# Altium PCB PCB_BAT.pcbdoc (part 2 of 2)
Units mil, origin at the board's own origin, x right, y up, seen from the top; angles counter-clockwise.
Board outline 4353.96 x 2705.18 mil, 2 copper layers (Top Layer, Bottom Layer), stack 62.206 mil thick; 127 components, 83 nets, 401 pads, 369 vias.
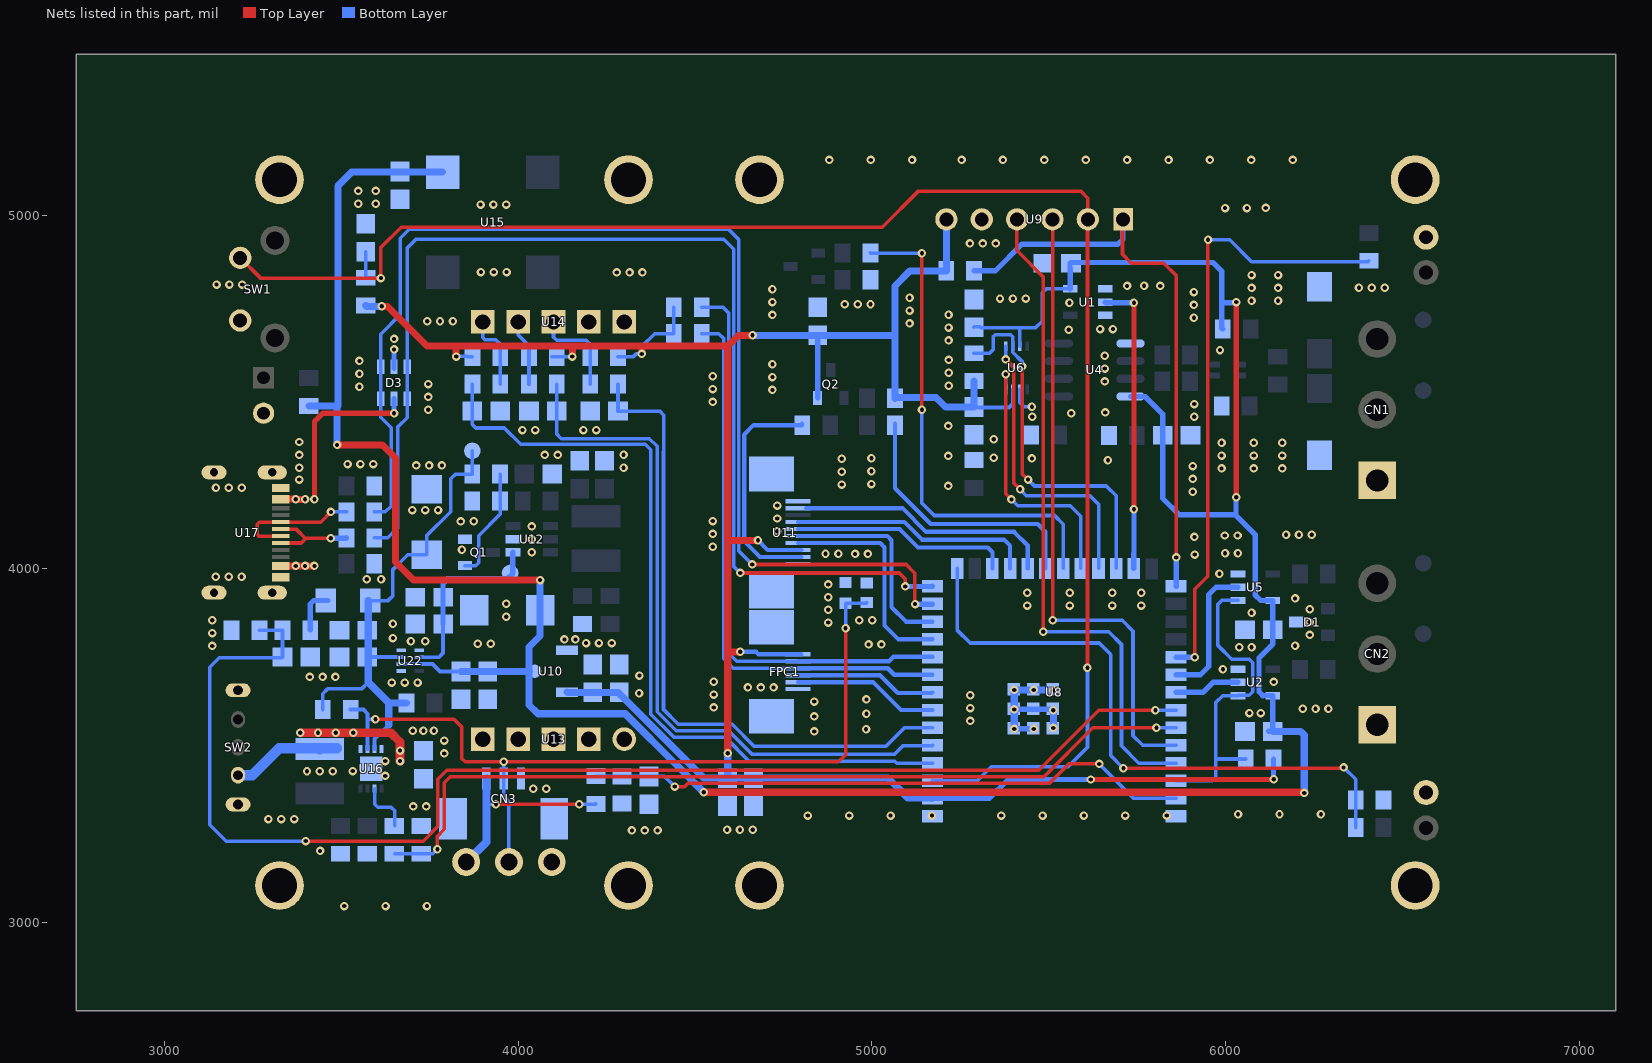
[diagram p2: the nets of this part, all layers, seen from the top]

## Via types
v1: diameter 24.02, hole 12, Top Layer to Bottom Layer, 369 vias

## Nets (pads, with @x,y where several pads share a name; then routed paths per layer and width w, separated by ;. In a path a pad name is that pad's centre, name@x,y a point inside that pad or via, vN(x,y) a via of type N, cw(c..) or ccw(c..) an arc to the next point about the centre after c; other vN are vias at no path point) (continued)
$2N79: C30.2 CN3.2 R48.2 R53.2 U16.6 U21.1 | length 2393.5
  Top Layer w10: v1(3596.18,3574.69) 3818.33,3574.69 3839.87,3553.15 3839.87,3464.04 3849.87,3454.04 v1(3958.87,3454.04) 4905.47,3454.04 4925.87,3474.44 v1(4925.87,3832.04)
  Bottom Layer w10: 3574.18,3574.69 v1(3596.18,3574.69) ; v1(3958.87,3454.04) CN3.2@3958.87,3407.13 3958.87,3356.04 3973.87,3341.04 U21.1@3973.87,3170.8 ; v1(4925.87,3832.04) R53.2@4925.87,3902.18 4983.58,3902.18 C30.2@4985.87,3904.48
  Bottom Layer w11: R48.2@3526.24,3602.04 3562.09,3602.04 3574.18,3589.95 3574.18,3574.69 U16.6@3574.18,3489.88
$2N87: Q1.1 R26.1 R27.2 | length 318.7
  Bottom Layer w10: Q1.1@3848.86,4008.29 3879.62,4008.29 3888.23,4016.91 3888.23,4093.69 3948.6,4154.06 R26.1@3948.6,4191.69 R27.2@3948.6,4267.69
$2N101: R39.1 U16.2 | length 150.9
  Bottom Layer w10: U16.2@3593.86,3378.26 3594.14,3377.99 3594.14,3334.27 3603.14,3325.27 3640.47,3325.27 3650.47,3315.27 R39.1@3650.47,3272.64
$2N102: U14.2
+3.3V: C5.2 C7.2 C8.2 C13.2 C14.2 C15.2 FPC1.1 Q2.2 R2.2 R5.2 R11.2 R17.2 R25.2 R33.2 R34.2 R36.2 R37.2 R38.2 U6.3 U8.2 U9.6 U10.3 U11.8 | length 7140.7
  Top Layer w15: v1(5618.87,3404.04) 6135.92,3404.04 v1(6136.77,3404.88)
  Top Layer w20: v1(3613.87,4742.04) 3630.38,4742.04 3742.38,4630.04 3824.5,4630.04 ; v1(3824.66,4600.04) 3824.5,4600.2 3824.5,4630.04 ; v1(4153.18,4600.04) 4153.18,4628.72 4154.49,4630.04 ; v1(4349.61,4607.38) 4349.61,4628.04 4347.61,4630.04 ; v1(4592.65,3478.2) 4592.65,3764.58 ; v1(4628.1,3765.02) 4627.66,3764.58 4592.65,3764.58 ; v1(4662.87,4660.04) 4622.5,4660.04 4592.65,4630.19 ; v1(4678.08,4080.6) 4677.32,4079.85 4592.65,4079.85 ; 3824.5,4630.04 4154.49,4630.04 ; 4154.49,4630.04 4347.61,4630.04 ; 4347.61,4630.04 4592.5,4630.04 4592.65,4630.19 ; 4592.65,3764.58 4592.65,4079.85 ; 4592.65,4079.85 4592.65,4630.19
  Bottom Layer w10: v1(3824.66,4600.04) 3824.93,4600.31 3856.23,4600.31 3856.5,4600.04 R36.2@3870.5,4600.04 ; R37.2@4095.24,4600.04 v1(4153.18,4600.04) ; R38.2@4282.24,4600.04 4325.87,4600.04 4333.22,4607.38 v1(4349.61,4607.38) 4349.61,4628.67 4385.91,4664.97 4439.87,4664.97 R33.2@4439.87,4739.63 ; C5.2@5288.87,4457.41 5290.24,4456.04 5387.87,4456.04 5398.96,4467.12 U6.3@5398.96,4507.16
  Bottom Layer w12: v1(4628.1,3765.02) 4672.89,3765.02 4679.88,3758.03 FPC1.1@4800.14,3758.03 ; v1(4678.08,4080.6) 4705.49,4053.2 U11.8@4800.14,4053.2
  Bottom Layer w15: Q2.2@4846.47,4482.97 4846.87,4483.37 4846.87,4660.04 C15.2@4846.87,4660.67 ; U8.2@5171.91,3350.04 5331.87,3350.04 5385.87,3404.04 v1(5618.87,3404.04) ; R5.2@6136.09,3461.85 6136.09,3405.55 v1(6136.77,3404.88)
  Bottom Layer w20: R11.2@3568.87,4744.36 3571.19,4742.04 v1(3613.87,4742.04) ; U10.3@4138.27,3650.98 4139.21,3650.04 4282.87,3650.04 4525.18,3407.73 C7.2@4591.77,3407.73 ; v1(4592.65,3478.2) 4592.65,3408.62 C7.2@4591.77,3407.73 ; v1(4662.87,4660.04) 4846.87,4660.04 5063.87,4660.04 5065.24,4658.67 ; U8.2@5171.55,3350.39 5169.46,3352.49 5101.42,3352.49 5045.87,3408.04 4666.05,3408.04 C8.2@4665.74,3407.73 C7.2@4591.77,3407.73 ; U9.6@5210.88,4988.04 5211.5,4987.41 5211.5,4843.57 R17.2@5210.5,4842.57 5108.4,4842.57 5065.24,4799.41 5065.24,4658.67 ; R2.2@5288.6,4530.83 5288.87,4530.55 C5.2@5288.87,4457.41 5208.5,4457.41 5181.9,4484.01 5067.22,4484.01 R25.2@5065.24,4482.04 5065.24,4658.67
+5V: C1.2 C2.2 C3.2 C4.1 C6.2 C11.2 C12.2 C22.2 R10.1 R12.2 TVS1.1 U1.5 U2.5 U4.8 U5.5 U6.7 U10.2 U15.1 U22.2 U22.7 | length 8374.4
  Top Layer w15: v1(6030.87,4202.04) v1(6030.87,4754.04)
  Top Layer w20: v1(3487.87,4350.04) 3616.07,4350.04 3652.87,4313.24 3652.87,4019.04 3703.93,3967.98 v1(4061.81,3967.98) ; v1(4524.87,3368.04) 6220.87,3368.04 v1(6222.87,3366.04)
  Bottom Layer w10: C4.1@5288.87,4682.67 5290.24,4684.04 5306.5,4684.04 5308.5,4682.04 5418.96,4682.04 ; U6.7@5418.96,4629.21 5418.96,4682.04 ; U1.5@5561.06,4792.04 5493.87,4792.04 5481.87,4780.04 5481.87,4700.04 5463.87,4682.04 5418.96,4682.04 ; U1.5@5561.13,4791.97 U1.5@5561.66,4791.44
  Bottom Layer w11: U22.2@3669.67,3730.2 U22.7@3720.07,3730.2 3757.71,3730.2 3778.5,3709.41 C11.2@3837.87,3709.41
  Bottom Layer w15: C1.2@5560.34,4864.04 5560.34,4851.3 5561.13,4850.51 U1.5@5561.13,4791.97 ; C1.2@5563.24,4864.04 5565.24,4866.04 5964.87,4866.04 5989.87,4841.04 5989.87,4752.04 ; U4.8@5731.51,4487.33 5773.04,4487.33 5822.5,4437.87 C6.2@5822.5,4377.51 5822.5,4199.41 5869.55,4152.37 6030,4152.37 ; R10.1@5992.5,4678.04 5990.5,4680.04 5989.87,4680.04 5989.87,4752.04 ; v1(6030.87,4202.04) 6030,4201.16 6030,4152.37 ; v1(6030.87,4754.04) 6028.87,4752.04 5989.87,4752.04 ; C3.2@6122.09,3540.16 6133.87,3540.16 U2.5@6133.89,3641.3 6105.61,3641.3 6094.87,3652.04 6094.87,3748.04 6134.09,3787.25 C2.2@6134.09,3827.28 6133.89,3827.48 U5.5@6133.89,3910.35 6133.57,3910.04 6099.87,3910.04 6083.87,3926.04 6083.87,4097.04 6030,4150.91 6030,4152.37
  Bottom Layer w20: R12.2@3407.87,4460.46 3489.87,4460.46 ; v1(3487.87,4350.04) 3487.87,4458.46 3489.87,4460.46 ; U15.1@3786.15,5121.77 3529.4,5121.57 3489.87,5082.04 3489.87,4460.46 ; C11.2@3837.87,3709.41 C12.2@3913.87,3709.41 U10.2@4030.84,3709.41 ; U10.2@4031.48,3710.04 U10.2@4030.87,3709.44 ; v1(4061.81,3967.98) TVS1.1@4061.81,3882.04 4061.81,3809.98 4030.87,3779.04 U10.2@4030.87,3709.44 ; v1(4524.87,3368.04) 4468.87,3424.05 4468.87,3424.66 4452.47,3441.05 4451.86,3441.05 4302.87,3590.04 4055.87,3590.04 4030.87,3615.04 U10.2@4030.87,3709.44 ; C3.2@6134.09,3540.16 6212.76,3540.16 6222.87,3530.04 v1@6222.87,3364.04
A: R37.1 R40.2 U14.4 | length 188.7
  Bottom Layer w10: U14.4@3999.87,4698.04 3999.87,4661.04 4030.5,4630.41 R37.1@4030.5,4600.04 R40.2@4030.5,4522.04
B: R36.1 R43.2 U14.5 | length 214.6
  Bottom Layer w10: U14.5@3899.87,4698.04 3899.87,4654.04 3905.87,4648.04 3936.87,4648.04 3949.24,4635.67 R36.1@3949.24,4600.04 R43.2@3949.24,4522.04
BAT_ADC: C10.2 R18.1 R21.2 U8.39 | length 1720.1
  Top Layer w10: v1(4442.87,3384.09) 4470.92,3384.09 4480.87,3394.04 5502.87,3394.04 5556.88,3448.05 v1(5643.39,3448.05)
  Bottom Layer w10: R18.1@4219.59,3413.69 4413.22,3413.69 v1@4442.83,3384.09 ; v1(5643.39,3448.05) 5741.04,3350.39 U8.39@5860.53,3350.39
BEEP: R41.1 U8.21 | length 1402.8
  Top Layer w10: v1(5141.84,4449.44) v1(5141.84,4892.01)
  Bottom Layer w10: R41.1@4996.15,4893.35 4997.49,4892.01 v1(5141.84,4892.01) ; v1(5141.84,4449.44) 5141.84,4185.07 5176.36,4150.55 5516.79,4150.55 5541.68,4125.67 5541.68,4001.42 U8.21@5541.04,4000.78
CHARGING: R35.1 R39.2 U8.35 | length 2457.3
  Top Layer w10: v1(3771.65,3207.03) 3771.65,3243.82 3790.87,3263.04 3790.87,3395.04 3807.87,3412.04 5486.87,3412.04 5624.87,3550.04 v1(5804.69,3550.04)
  Bottom Layer w10: R39.2@3650.47,3193.9 R35.1@3725.87,3193.9 3758.53,3193.9 v1(3771.65,3207.03) ; v1(5804.69,3550.04) 5860.89,3550.04 U8.35@5860.53,3550.39
CTP_INT: FPC1.4 U8.8 | length 402
  Bottom Layer w12: FPC1.4@4791.14,3698.97 5022.94,3698.97 5073.33,3648.58 5169.74,3648.58 U8.8@5171.55,3650.39
CTP_RST: FPC1.5 U8.7 | length 413.1
  Bottom Layer w12: FPC1.5@4791.14,3679.29 5003.62,3679.29 5082.52,3600.39 U8.7@5171.55,3600.39
CTP_SCL: FPC1.3 R34.1 U8.9 | length 1582.5
  Bottom Layer w10: R34.1@4518.84,4664.97 4567.13,4664.97 4580.87,4651.23 4580.87,3746.04 4608.25,3718.66 FPC1.3@4791.14,3718.66
  Bottom Layer w12: FPC1.3@4791.14,3718.66 5045.25,3718.66 5063.52,3700.39 U8.9@5171.55,3700.39
CTP_SDA: FPC1.2 R33.1 U8.10 | length 1637
  Bottom Layer w10: R33.1@4518.84,4739.63 4579.16,4739.63 4594.87,4723.92 4594.87,3761.04 4617.57,3738.34 FPC1.2@4791.14,3738.34
  Bottom Layer w12: FPC1.2@4791.14,3738.34 5048.87,3738.34 5061.51,3750.98 5170.96,3750.98 U8.10@5171.55,3750.39
DMX_EN: U1.2 U8.25 | length 833.2
  Top Layer w15: v1(5741.2,4168.03) v1(5741.19,4752.03)
  Bottom Layer w15: U1.2@5660.09,4754.04 5662.09,4752.03 v1(5741.19,4752.03) ; U8.25@5741.04,4000.78 5741.04,4042.62 5741.2,4042.77 v1(5741.2,4168.03)
DMX_OE: R2.1 U6.6 U8.24 | length 1051.2
  Top Layer w10: v1(5424.87,4572.04) 5424.87,4269.04 v1(5441.87,4252.04)
  Bottom Layer w10: R2.1@5288.6,4609.57 5332.87,4609.57 5342.87,4619.57 5342.87,4656.04 5348.87,4662.04 5392.87,4662.04 5398.96,4655.95 U6.6@5398.96,4629.21 5398.96,4611.95 5424.87,4586.04 v1(5424.87,4572.04) ; v1(5441.87,4252.04) 5459.87,4234.04 5663.11,4234.04 5691.04,4206.1 U8.24@5691.04,4000.78
DMX_RX: U6.4 U8.22 | length 767.1
  Top Layer w10: v1(5378.87,4550.04) 5378.87,4212.04 v1(5394.87,4196.04)
  Bottom Layer w10: v1(5378.87,4550.04) 5378.96,4549.95 U6.4@5378.96,4507.16 ; v1(5394.87,4196.04) 5412.25,4178.66 5560.85,4178.66 5591.04,4148.47 U8.22@5591.04,4000.78
DMX_TX: U6.5 U8.23 | length 842.4
  Top Layer w10: v1(5378.87,4592.04) 5401.87,4569.04 5401.87,4242.04 v1(5419.27,4224.64)
  Bottom Layer w10: v1(5378.87,4592.04) 5378.96,4592.12 U6.5@5378.96,4629.21 ; v1(5419.27,4224.64) 5437.14,4206.77 5616.99,4206.77 5641.09,4182.68 U8.23@5641.09,4000.83
DN: R50.1 U17.A7 U17.B7 | length 351.6
  Top Layer w10: U17.A7@3315.15,4092.55 3314.64,4092.04 3266.87,4092.04 3261.87,4097.04 3261.87,4126.04 3267.75,4131.92 U17.B7@3328.76,4131.87 3441.75,4131.92 v1(3470.37,4160.54)
  Bottom Layer w10: v1(3470.37,4160.54) 3470.54,4160.7 R50.1@3514.5,4160.7
DP: R51.2 U17.A6 U17.B6 | length 300.9
  Top Layer w10: U17.B6@3315.15,4072.86 3386.69,4072.86 3399.87,4086.04 ; U17.A6@3315.15,4112.23 3371.68,4112.23 3397.87,4086.04 3399.87,4086.04 ; v1(3469.87,4086.04) 3399.87,4086.04
  Bottom Layer w15: v1(3469.87,4086.04) 3513.17,4086.04 R51.2@3514.5,4087.37
EN: C9.2 R11.1 SW1.1 U8.3 U9.2 | length 4740.9
  Top Layer w10: SW1.1@3213.89,4879.23 3271.08,4822.04 v1(3611.87,4822.04) 3611.87,4909.04 3668.87,4966.04 5029.87,4966.04 5131.87,5068.04 5590.87,5068.04 5610.87,5048.04 U9.2@5610.88,4988.04 ; v1(5609.87,3719.91) U9.2@5609.87,4977.04 ; U9.2@5609.87,4977.04 5610.87,4978.04 U9.2@5610.88,4988.04 ; U9.2@5609.87,4977.04 5609.87,4987.03 U9.2@5610.88,4988.04
  Bottom Layer w10: C9.2@3568.87,4896.36 R11.1@3568.87,4823.1 3610.81,4823.1 v1(3611.87,4822.04) ; U8.3@5171.55,3400.39 5297.98,3400.39 5337.62,3440.04 5554.87,3440.04 5609.87,3495.04 v1(5609.87,3719.91)
ENCODER_A: C26.2 R40.1 U8.5 | length 2027.7
  Bottom Layer w10: R40.1@4109.24,4522.04 C26.2@4109.24,4446.04 4109.24,4380.86 4122.06,4368.04 4370.87,4368.04 4392.87,4346.04 4392.87,3596.04 4446.87,3542.04 4594.87,3542.04 4660.87,3476.04 5064.88,3476.04 5088.88,3500.04 5171.2,3500.04 U8.5@5171.55,3500.39
ENCODER_B: C25.2 R43.1 U8.4 | length 2250.5
  Bottom Layer w10: R43.1@3870.5,4522.04 3869.87,4521.41 3869.87,4408.04 3879.87,4398.04 3960.87,4398.04 4006.87,4352.04 4358.87,4352.04 4374.87,4336.04 4374.87,3589.05 4439.87,3524.04 4584.87,3524.04 4652.87,3456.04 5064.87,3456.04 5070.87,3450.04 5171.2,3450.04 U8.4@5171.55,3450.39
ENCODER_KEY: C27.2 R42.2 U8.6 | length 1868.4
  Bottom Layer w10: R42.2@4282.24,4522.04 C27.2@4282.24,4446.04 4399.87,4446.04 4411.87,4434.04 4411.87,4331.45 4410.87,4330.45 4410.87,3602.04 4452.87,3560.04 4604.87,3560.04 4666.86,3498.05 5039.89,3498.05 5092.23,3550.39 U8.6@5171.55,3550.39
GND: C1.1 C2.1 C3.1 C4.2 C5.1 C6.1 C7.1 C8.1 C9.1 C10.1 C11.1 C12.1 C13.1 C14.1 C15.1 C16.1 C17.2 C18.2 C20.2 C21.2 C22.1 C23.2 C24.1 C25.1 C26.1 C27.1 C28.2 C29.1 C30.1 CN1.1 CN2.1 CN3.1 CN3.4 CN3.5 D1.3 D3.2 D4.2 FPC1.6 FPC1.7 FPC1.8 LED1.2 LED2.2 LED3.2 pad.1 Q1.2 R3.2 R4.2 R13.2 R19.1 R20.1 R21.1 R24.1 R26.2 R32.1 R35.2 R44.1 R45.2 R47.2 R49.1 R52.2 R53.1 SW1.2 SW2.4 SW2.5 TVS1.2 U1.1 U1.3 U2.3 U3.1 U4.5 U5.3 U6.2 U7.1 U8.1 U8.40 U8.41 U9.5 U10.1 U11.1 U11.10 U11.11 U11.12 U12.2 U13.1 U13.2 U13.3 U13.4 U13.5 U14.1 U16.8 U16.9 U17.1 U17.2 U17.3 U17.4 U17.A1B12 U17.B1A12 U19.1 U22.1 U22.4 U22.5 | length 565.7
  Bottom Layer w10: U6.2@5418.96,4507.16 5418.96,4469.95 5430.87,4458.04 v1(5452.87,4458.04)
  Bottom Layer w15: D3.2@3648.87,4567.28 v1(3648.87,4620.04) ; v1(5402.85,3547.21) v1(5457.97,3547.21) ; v1(5402.85,3602.33) 5510.9,3602.33 v1(5513.2,3600.03)
  Bottom Layer w20: v1(5402.85,3547.21) v1(5402.85,3602.33) v1(5402.85,3657.45) v1(5457.97,3657.45) U8.41@5513.09,3657.45 ; v1(5513.2,3550.03) v1(5513.2,3600.03)
  other v1: 3507.87,3046.04 3624.89,3046.04 3741.92,3046.04 3439.87,3202.04 4321.48,3260.04 4357.87,3260.04 4394.27,3260.04 4590.48,3262.04 4626.87,3262.04 4663.27,3262.04 3293.86,3292.09 3330.26,3292.09 3366.66,3292.09 4818.85,3302.04 4935.87,3302.04 5052.89,3302.04 5169.92,3302.04 5365.67,3302.05 5482.69,3302.05 5599.71,3302.05 5716.73,3302.05 5833.75,3302.05 6035.83,3306.04 6152.85,3306.04 6269.87,3306.04 3703.48,3328.04 3739.87,3328.04 4042.67,3378.04 4079.07,3378.04 3623.87,3414.04 3402.75,3427.27 3439.15,3427.27 3475.55,3427.27 3531.87,3428.04 3623.87,3456.04 3790.87,3477.84 3790.87,3514.24 4837.15,3540.04 3701.87,3542.04 3731.87,3542.04 3761.87,3542.04 4983.87,3546.04 5278.1,3569.66 4837.15,3582.23 4984.87,3590.04 6067.87,3592.04 6099.87,3592.04 6218.48,3604.04 6254.87,3604.04 6291.27,3604.04 5278.1,3606.05 4552.99,3607.73 4837.15,3624.43 4984.87,3630.43 5278.1,3642.45 4552.99,3644.13 4341.87,3648.04 5513.2,3656.03 4649.52,3664.34 4685.91,3664.34 4722.31,3664.34 3642.48,3678.04 3678.87,3678.04 3715.27,3678.04 6136.87,3680.04 4552.99,3680.53 3410.48,3694.04 3446.87,3694.04 3483.27,3694.04 4342.87,3698.04 5992.87,3716.04 6038.87,3778.04 6073.87,3778.04 3134.87,3781.64 6196.87,3782.04 4990.67,3786.04 5027.07,3786.04 3885.67,3788.04 3922.07,3788.04 4191.83,3789.69 4228.23,3789.69 4264.63,3789.69 3696.65,3795.14 3737.09,3795.14 4130.87,3800.04 4161.87,3800.04 3645.87,3804.04 6238.21,3812.97 3134.87,3818.04 3645.87,3844.48 4876.87,3847.84 6238.21,3849.37 3134.87,3854.43 4964.67,3854.04 5001.07,3854.04 3966.03,3864.5 6073.7,3875.47 4876.87,3884.24 6238.21,3885.77 5439.87,3896.04 5559.87,3896.04 5679.87,3896.04 5761.87,3896.05 3966.03,3900.89 6196.87,3916.04 4876.71,3919.42 5439.87,3932.43 5559.87,3932.43 5679.87,3932.43 5761.87,3932.44 4876.71,3955.82 3571.65,3970.02 3612.09,3970.02 3144.87,3977.65 3181.26,3977.65 3217.66,3977.65 5982.87,3986.04 5913.48,4040.04 4869.01,4042.2 4905.41,4042.2 4952.67,4042.04 4989.07,4042.04 5998.87,4044.04 6035.27,4044.04 4038.23,4046.81 3840.87,4054.04 4549.99,4062.22 4038.23,4083.2 5912.48,4090.04 5997.87,4094.04 6034.27,4094.04 6171.48,4096.04 6207.87,4096.04 6244.27,4096.04 4549.99,4098.62 4732.35,4105.72 4038.23,4119.6 3837.68,4133.78 3874.32,4134.25 4549.99,4135.01 4732.35,4142.12 3700.48,4166.04 3736.87,4166.04 3773.27,4166.04 4732.35,4178.51 5907.87,4217.64 3145.28,4228.76 3181.67,4228.76 3218.07,4228.76 5215.87,4234.04 4914.92,4238.14 4998.87,4239.64 3380.87,4252.04 5907.87,4254.04 4914.92,4274.54 4998.87,4276.04 5988.87,4283.64 6079.87,4283.64 6160.87,4283.64 3380.87,4285.64 4297.87,4285.84 5907.87,4290.43 3711.48,4292.04 3747.87,4292.04 3784.27,4292.04 3517.48,4296.04 3553.87,4296.04 3590.27,4296.04 5667.66,4307.16 4914.92,4310.94 4998.87,4312.43 5452.87,4312.04 5344.87,4314.04 5215.87,4319.04 5988.87,4320.04 6079.87,4320.04 6160.87,4320.04 3380.87,4322.04 4075.23,4321.69 4111.63,4321.69 4297.87,4322.24 5988.87,4356.43 6079.87,4356.43 6160.87,4356.43 3380.87,4358.43 5344.87,4366.04 4011.87,4392.04 4048.27,4392.04 4184.48,4392.04 4220.87,4392.04 5215.87,4404.04 5453.87,4430.04 5911.75,4429.64 5563.87,4440.04 5659.87,4442.04 3745.87,4449.64 5911.75,4465.79 4549.97,4471.63 3745.87,4486.04 4718.87,4505.64 4549.97,4508.02 3551.18,4514.85 5217.87,4517.64 3745.87,4522.43 5658.87,4529.64 4718.87,4542.04 4549.97,4544.42 3551.18,4551.24 5217.87,4554.04 5658.87,4566.04 4718.87,4578.43 3551.18,4587.64 5217.87,4590.43 5658.87,4602.43 5984.59,4618.38 5216.87,4645.64 3648.87,4650.04 5556.87,4676.04 5645.52,4677.97 5681.91,4677.97 5216.87,4682.04 5106.87,4693.64 3742.48,4700.04 3778.87,4700.04 3815.27,4700.04 5910.84,4709.55 4718.87,4717.64 5216.87,4718.43 5106.87,4730.04 5910.84,4745.94 4923.48,4748.04 4959.87,4748.04 4996.27,4748.04 5558.87,4752.04 4718.87,4754.04 6073.87,4757.64 6148.87,4757.64 5362.48,4764.04 5398.87,4764.04 5435.27,4764.04 5106.87,4766.43 5910.84,4782.34 4718.87,4790.43 6073.87,4794.04 6148.87,4794.04 6377.52,4794.72 6413.92,4794.72 6450.31,4794.72 5721.87,4799.64 5769.87,4800.04 5815.87,4799.64 3147.02,4803.78 3183.42,4803.78 3219.81,4803.78 6073.87,4830.43 6148.87,4830.43 4278.48,4838.04 4314.87,4838.04 4351.27,4838.04 3894.48,4838.97 3930.87,4838.97 3967.27,4838.97 5277.48,4920.04 5313.87,4920.04 5350.27,4920.04 5998.87,5020.04 6060.87,5020.04 6113.87,5020.43 3893.48,5030.04 3929.87,5030.04 3966.27,5030.04 3547.87,5032.04 3596.87,5032.04 3547.87,5068.43 3596.87,5068.43 4879.85,5156.04 4996.87,5156.04 5113.89,5156.04 5253.87,5156.04 5370.89,5156.04 5487.92,5156.04 5604.94,5156.04 5721.96,5156.04 5838.98,5156.04 5956,5156.04 6073.02,5156.04 6190.05,5156.04
IO0: R17.1 U8.27 U9.1 | length 1657.7
  Top Layer w10: U9.1@5710.88,4988.04 5708.87,4986.03 5708.87,4889.04 5733.87,4864.04 5825.87,4864.04 5860.57,4829.34 v1(5860.57,4032.09)
  Bottom Layer w15: R17.1@5289.24,4842.57 5349.4,4842.57 5424.87,4918.04 5695.87,4918.04 5709.53,4931.69 U9.1@5709.53,4977.04 ; U8.27@5860.53,3950.39 v1@5860.53,4032.05
KEY: R38.1 R42.1 U14.3 | length 267.5
  Bottom Layer w10: U14.3@4099.87,4698.04 4099.87,4655.04 4108.87,4646.04 4191.87,4646.04 4203.23,4634.68 4203.23,4522.31 R42.1@4203.5,4522.04
LCD_A: R30.1 U11.9 | length 659.5
  Bottom Layer w12: U11.9@4800.14,4033.51 4683.41,4033.51 4638.9,4078.01 4638.9,4379.07 4665.87,4406.04 4802.5,4406.04 R30.1@4802.5,4410.04
LCD_BL: R28.1 U8.20 | length 763.4
  Bottom Layer w12: R28.1@5065.24,4410.04 5065.24,4227.67 5166.46,4126.46 5469.39,4126.46 5491.48,4104.37 5491.48,4001.22 U8.20@5491.04,4000.78
LCD_CS: U8.17 U11.5 | length 623.1
  Bottom Layer w12: U11.5@4791.14,4112.25 5078.67,4112.25 5130.72,4060.2 5327.72,4060.2 5341.04,4046.87 U8.17@5341.04,4000.78
LCD_RS: U8.11 U11.7 | length 622.7
  Bottom Layer w12: U11.7@4791.14,4072.88 4791.43,4072.59 5023.87,4072.59 5035.87,4060.59 5035.87,3839.66 5075.14,3800.39 U8.11@5171.55,3800.39
LCD_RST: U8.12 U11.6 | length 591.6
  Bottom Layer w12: U11.6@4791.14,4092.57 5043.87,4092.57 5055.87,4080.57 5055.87,3891.31 5096.79,3850.39 U8.12@5171.55,3850.39
LCD_SCL: U8.18 U11.4 | length 692
  Bottom Layer w12: U11.4@4791.14,4131.94 5091.98,4131.94 5141.63,4082.28 5374.08,4082.28 5391.04,4065.32 U8.18@5391.04,4000.78
LCD_SDA: U8.19 U11.2 | length 735.7
  Bottom Layer w12: U11.2@4814.14,4171.31 5086.61,4171.31 5153.54,4104.37 5402.56,4104.37 5441.04,4065.88 U8.19@5441.04,4000.78
LED2: R22.2 R49.2 U8.15 | length 1781.7
  Top Layer w10: v1(5711.49,3436.03) 6331.87,3436.03 v1(6333.87,3438.04)
  Bottom Layer w10: U8.15@5241.04,4000.78 5241.04,3959.66 5241.14,3959.56 5241.14,3940.51 5241.04,3940.42 5241.04,3826.87 5277.87,3790.04 5642.87,3790.04 5675.53,3757.38 5675.53,3471.98 v1(5711.49,3436.03) ; v1(6333.87,3438.04) 6334.87,3438.04 6368.5,3404.41 R49.2@6368.5,3346.04 R22.2@6368.5,3268.04
LED3: R23.2 U8.31 | length 1730
  Top Layer w10: v1(5912.87,3750.04) 5912.87,3942.04 5949.87,3979.04 5949.87,4929.04 v1(5950.87,4930.04)
  Bottom Layer w10: v1(5950.87,4930.04) 6011.87,4930.04 6073.87,4868.04 6403.24,4868.04 R23.2@6405.87,4870.67
  Bottom Layer w15: U8.31@5860.53,3750.39 5860.89,3750.04 v1(5912.87,3750.04)
RXD0: U8.36 U9.3 | length 1802.8
  Top Layer w10: U9.3@5510.88,4988.04 5511.87,4987.04 v1(5511.87,3854.04)
  Bottom Layer w10: v1(5511.87,3854.04) 5707.87,3854.04 5738.53,3823.38 5738.53,3527.6 5765.73,3500.39 U8.36@5860.53,3500.39
RZ_CLK: U5.2 U8.32 | length 396.3
  Bottom Layer w15: U8.32@5860.53,3700.39 5929.23,3700.39 5952.87,3724.04 5952.87,3927.04 5973.59,3947.75 U5.2@6035.46,3947.75
RZ_DATA: U2.2 U8.33 | length 186.7
  Bottom Layer w15: U8.33@5860.53,3650.39 5936.23,3650.39 5964.53,3678.7 U2.2@6035.46,3678.7
RZ_OE: R5.1 U2.1 U5.1 U8.38 | length 907.1
  Bottom Layer w10: U8.38@5860.53,3400.39 5963.23,3400.39 5973.23,3410.39 5973.23,3462.04 ; U5.1@6035.46,3910.35 5989.19,3910.35 5978.87,3900.04 5978.87,3783.04 6017.87,3744.04 6066.87,3744.04 6076.87,3734.04 6076.87,3652.04 6066.87,3642.04 6036.2,3642.04 U2.1@6035.46,3641.3 5992.13,3641.3 5973.23,3622.39 5973.23,3462.04 ; R5.1@6057.35,3461.85 6057.16,3462.04 5973.23,3462.04
TXD0: U8.37 U9.4 | length 1895.3
  Top Layer w10: U9.4@5410.88,4988.04 5409.53,4986.69 5409.53,4900.38 5484.87,4825.04 v1(5484.87,3822.04)
  Bottom Layer w10: v1(5484.87,3822.04) 5669.87,3822.04 5706.05,3785.86 5706.05,3499.25 5754.9,3450.39 U8.37@5860.53,3450.39
USB_DET: C29.2 R24.2 R46.1 U8.34 | length 3863.1
  Top Layer w10: v1(3399.12,3229.8) 3731.63,3229.8 3772.87,3271.04 3772.87,3405.04 3797.87,3430.04 5471.87,3430.04 5641.87,3600.04 v1(5802.03,3600.04)
  Bottom Layer w10: R24.2@3268.24,3826.04 R46.1@3332.87,3826.04 ; C29.2@3332.87,3751.41 R46.1@3332.87,3826.04 ; v1(3399.12,3229.8) 3174.12,3229.8 3127.87,3276.04 3127.87,3721.04 3154.87,3748.04 3331.5,3748.04 C29.2@3333.5,3750.04 R46.1@3333.5,3826.04 R46.1@3332.87,3826.04 ; v1(5802.03,3600.04) 5860.89,3600.04 U8.34@5860.53,3600.39
USB_DN: D3.1 D3.6 R50.2 U8.13 | length 3368.7
  Top Layer w10: v1(4661.87,4012.05) 5096.87,4012.05 5121.87,3987.04 5121.87,3900.3 v1(5122.13,3900.04)
  Bottom Layer w10: R50.2@3593.24,4160.7 3624.54,4160.7 3640.87,4177.04 3640.87,4399.04 3611.47,4428.44 D3.6@3611.47,4480.8 D3.1@3611.47,4571.28 3611.47,4663.64 3666.87,4719.04 3666.87,4935.04 3691.87,4960.04 4594.87,4960.04 4623.89,4931.02 4623.89,4050.02 v1(4661.87,4012.05)
  Bottom Layer w15: v1(5122.13,3900.04) 5171.2,3900.04 U8.13@5171.55,3900.39
USB_DP: D3.3 D3.4 R51.1 U8.14 | length 3320.8
  Top Layer w10: v1(4628.12,3988.04) 5077.87,3988.04 5094.87,3971.04 v1(5094.87,3950.04)
  Bottom Layer w10: R51.1@3593.24,4087.37 3631.21,4087.37 3658.87,4115.04 3658.87,4400.04 3685.87,4427.04 3685.87,4907.04 3710.87,4932.04 4580.87,4932.04 4609.87,4903.04 4609.87,4006.28 v1(4628.12,3988.04)
  Bottom Layer w15: v1(5094.87,3950.04) 5171.2,3950.04 U8.14@5171.55,3950.39
VBAT: C28.1 CN3.3 L3.1 R18.2 SW2.3 U16.5 U20.1 | length 1230
  Top Layer w10: v1(3936.87,3334.04) v1(4172.87,3334.04)
  Top Layer w25: v1(3383.87,3536.04) v1(3433.87,3536.04) v1(3483.87,3536.04) v1(3533.87,3536.04) 3639.87,3536.04 3665.87,3510.04 v1(3665.87,3485.8) v1(3665.87,3456.04)
  Bottom Layer w10: 3909.87,3334.04 v1(3936.87,3334.04) ; v1(4172.87,3334.04) 4218.68,3334.04 R18.2@4219.59,3334.95
  Bottom Layer w23: U20.1@3852.87,3170.8 3909.87,3227.8 3909.87,3334.04 CN3.3@3909.87,3406.92
  Bottom Layer w30: SW2.3@3207.87,3416.31 3248.18,3416.34 3323.87,3492.04 L3.1@3437.36,3492.04 ; L3.1@3439.14,3490.26 L3.1@3437.36,3492.04 ; L3.1@3487.36,3492.04 L3.1@3437.36,3492.04
VBUS: D3.5 F1.2 R46.2 U17.A4B9 U17.B4A9 | length 813.8
  Top Layer w15: v1(3423.87,4196.87) 3423.87,4416.04 3447.87,4440.04 v1(3648.87,4440.04)
  Top Layer w20: U17.B4A9@3315.16,4007.9 v1(3370.88,4007.9) 3423.73,4007.9 v1(3423.87,4008.04) ; U17.A4B9@3315.16,4196.87 v1(3370.88,4196.87) 3371.71,4196.04 3395.37,4196.04 v1@3397.37,4198.04
  Bottom Layer w15: R46.2@3411.87,3827.41 3411.87,3899.93 3421.98,3910.04 F1.2@3461.98,3910.04 ; v1(3648.87,4440.04) D3.5@3648.87,4480.8
  other v1: 3397.37,4008.04 3397.37,4196.87
VCHAR: C23.1 C24.2 D4.1 F1.1 R27.1 R48.1 R54.2 TVC.1 U16.7 U22.3 | length 1435.7
  Bottom Layer w10: R48.1@3447.5,3602.04 3447.5,3646.67 3460.87,3660.04 3556.87,3660.04 3575.87,3679.04 ; C24.2@3573.24,3826.04 C24.2@3575.87,3826.04 ; F1.1@3575.76,3910.04 3631.87,3910.04 3645.87,3924.04 3645.87,3998.04 3687.87,4040.04 3739.93,4040.04 D4.1@3740.87,4039.1 3740.87,4093.04 3808.87,4161.04 3808.87,4254.04 3822.53,4267.69 R27.1@3869.86,4267.69 3869.86,4332.88 TVC.1@3870.34,4333.36
  Bottom Layer w11: C23.1@3573.24,3750.04 3575.87,3750.04 3669.51,3750.04 U22.3@3669.67,3749.88 ; U16.7@3593.86,3489.88 3593.86,3518.03 3633.87,3558.04
  Bottom Layer w20: F1.1@3575.76,3910.04 3575.87,3909.93 3575.87,3826.04 3575.87,3750.04 3575.87,3679.04 3633.87,3621.04 ; 3633.87,3558.04 3633.87,3621.04 ; R54.2@3684.5,3620.04 3634.87,3620.04 3633.87,3621.04
VDC_5V: C20.1 C21.1 TVDC.1 U12.1 U22.6 | length 537.8
  Bottom Layer w11: U22.6@3720.07,3749.88 3775.71,3749.88 3787.6,3761.77 C20.1@3787.6,3843.69
  Bottom Layer w15: C20.1@3787.6,3843.69 C21.1@3787.6,3919.69 3787.6,3958.77 3800.87,3972.04 3969.87,3972.04 3984.87,3987.04 3984.87,4046.09 U12.1@3985.08,4046.29
pads on no net: SW1.3 SW1.4 SW2.1 U8.28 U8.29 U8.30 U15.3 U15.4 U17.A8 U17.B8

## Polygon pours and split planes (outlines as drawn)
VBUS on Top Layer (solid, remove dead copper, pour order 10): 3325.87,3988.04 3325.87,4218.04 3437.87,4218.04 3437.87,4178.04 3437.41,4177.57 3436.94,4178.04 3380.32,4178.04 3380.32,4032.04 3437.48,4032.04 3437.48,3988.04
GND on Top Layer (solid, remove dead copper, pour order 12): 3091.87,5205.18 3091.87,3000.04 6754.24,3000.04 6754.24,5205.18
VBUS on Bottom Layer (solid, remove dead copper, pour order 24): 3355.87,4216.04 3445.87,4216.04 3445.87,3942.81 3488,3943.01 3488,3874.04 3355.87,3874.04
GND on Bottom Layer (solid, remove dead copper, pour order 42): 3091.87,5205.14 3091.87,3000 6755.96,3000 6755.96,5205.14
VBAT on Bottom Layer (solid, remove dead copper, pour order 32): 3369.68,3550.04 3369.68,3458.04 3562.66,3458.04 3562.66,3550.04
VBAT on Bottom Layer (solid, remove dead copper, pour order 34): 3651.59,3504.04 3681.56,3504.04 3681.56,3440.15 3924.32,3440.15 3924.28,3376.04 3651.5,3376.04
$2N70 on Bottom Layer (solid, remove dead copper, pour order 40): 4068.87,4108.04 4068.87,4221.18 4145.87,4221.18 4145.87,4255.93 4327.61,4255.93 4327.61,4190.04 4290.87,4190.04 4290.87,4108.04

## Keep-outs
Board Outline Layer:
  region: 4513.96,3610.27 ccw(c4513.96,3620.27) 4523.96,3620.27 4523.96,4584.53 ccw(c4513.96,4584.53) 4513.96,4594.53 4446.9,4594.53 ccw(c4446.9,4584.53) 4436.9,4584.53 4436.9,3620.27 ccw(c4446.9,3620.27) 4446.9,3610.27
  region: 4513.96,3610.27 ccw(c4513.96,3620.27) 4523.96,3620.27 4523.96,4584.53 ccw(c4513.96,4584.53) 4513.96,4594.53 4446.9,4594.53 ccw(c4446.9,4584.53) 4436.9,4584.53 4436.9,3620.27 ccw(c4446.9,3620.27) 4446.9,3610.27
  region: 4839.32,3280.58 4839.32,3002.51 6200.57,3002.51 6200.57,3280.58
  lines w0.1: 4436.9,3620.27 4436.9,4584.53 cw(c4446.9,4584.53) 4446.9,4594.53 4513.96,4594.53 cw(c4513.96,4584.53) 4523.96,4584.53 4523.96,3620.27 cw(c4513.96,3620.27) 4513.96,3610.27 4446.9,3610.27 cw(c4446.9,3620.27) 4436.9,3620.27
  lines w10: 3091.87,5054.04 3091.92,3919.33 3091.92,3168.16 ; 3091.92,3168.23 ccw(c3263.16,3170.92) 3251.81,3000.04 ; 3091.88,5054.07 cw(c3252.52,5043.12) 3258.13,5204.04 ; 3251.87,3000.04 3829.82,3000.05 3829.82,3115.04 4106.87,3115.04 4106.87,3000.05 4928.95,3000.05 ccw(c4925.4,3070.11) 4995.46,3073.66 ; 3252.52,5204.14 6593.89,5204.04 ; 4995.55,3070.12 4995.46,3242.45 6042.11,3242.45 6042.18,3066.61 ccw(c6111.38,3069.26) 6114.76,3000.1 ; 6114.78,3000.1 6586.52,3000.09 ; 6586.45,3000.09 ccw(c6583.76,3171.32) 6754.64,3159.97 ; 6594.71,5204.03 cw(c6583.36,5033.15) 6754.6,5035.84 ; 6754.6,5035.91 6754.64,3160.04

## Silkscreen, mask and mechanical layers (free items; w line width, h text height)
Top Silkscreen Layer:
  drawing of 27 lines, arcs and shapes, not listed
  text "RESET" at 3381.24,4937.68 h100 r270
  text "3V3" at 5170.87,4914.04 h75 r270
  text "GND" at 5271.27,4914.04 h75 r270
  text "TX0" at 5371.67,4914.04 h75 r270
  text "RX0" at 5472.07,4914.04 h75 r270
  text "EN" at 5572.47,4914.04 h75 r270
  text "IO0" at 5672.87,4914.04 h75 r270
  text "RDM/DMX" at 6243.87,4684.04 h100 r270
  text "PWR" at 3381.24,4580.04 h100 r270
  text "ESP-DMX-RDM-RZ /   PixelBridge v1.5" at 5120.87,4470.04 h80 r270
  text "F111 Studio" at 5479.87,4332.04 h80 r270
  text "RZ_CODE" at 6249.87,3990.04 h100 r270
  text "+ T -" at 3827.7,3214.61 h90
Bottom Silkscreen Layer:
  lines w10: 6361.06,3855.87 6616.46,3855.87 ; 6361.32,3654.57 6617.64,3654.57 ; 6361.38,4547.5 6617.4,4547.5 ; 6362.02,4347.5 6617.79,4347.5 ; 6617.89,3458.73 6617.89,4059.3 ; 6617.89,4148.97 6617.89,4749.55 ; 6360.06,3458.14 6738.19,3458.14 6738.19,4058.62 6360.06,4058.62 6360.06,3458.14 ; 6360.06,4749.55 6360.93,4748.68 6360.93,4148.97 6739.42,4148.97 6739.42,4749.55 6360.06,4749.55
  text "A" at 6515.3,4624.41 h80 r270
  text "B" at 6507.27,4425.63 h80 r270
  text "RDM/DMX" at 6627.74,4198.74 h100 r270
  text "GND" at 6507.61,4176.64 h80 r270
  text "NTC" at 4951.88,3983.19 h50
  text "C" at 6503.6,3937.16 h80 r270
  text "D" at 6503.6,3741.15 h80 r270
  text "RZ_CODE" at 6627.74,3532.12 h100 r270
  text "GND" at 6503.6,3486.66 h80 r270
Mechanical Layer:
  lines w0.1: 4436.9,3620.27 4436.9,4584.53 cw(c4446.9,4584.53) 4446.9,4594.53 4513.96,4594.53 cw(c4513.96,4584.53) 4523.96,4584.53 4523.96,3620.27 cw(c4513.96,3620.27) 4513.96,3610.27 4446.9,3610.27 cw(c4446.9,3620.27) 4436.9,3620.27

## Text inside footprints (layer, text, board x,y; h text height)
U15: Bottom Silkscreen Layer "+" at 3888.51,5078.48 h80 r90